# Altium PCB T-Type Converter.PcbDoc (part 2 of 4)
Units mil, origin at the board's own origin, x right, y up, seen from the top; angles counter-clockwise.
Board outline 14649.61 x 8960.63 mil, 2 copper layers (Top Layer, Bottom Layer), stack 64.8 mil thick; 214 components, 130 nets, 860 pads, 57 vias.
Unrouted connection lines stored in the file: 20.
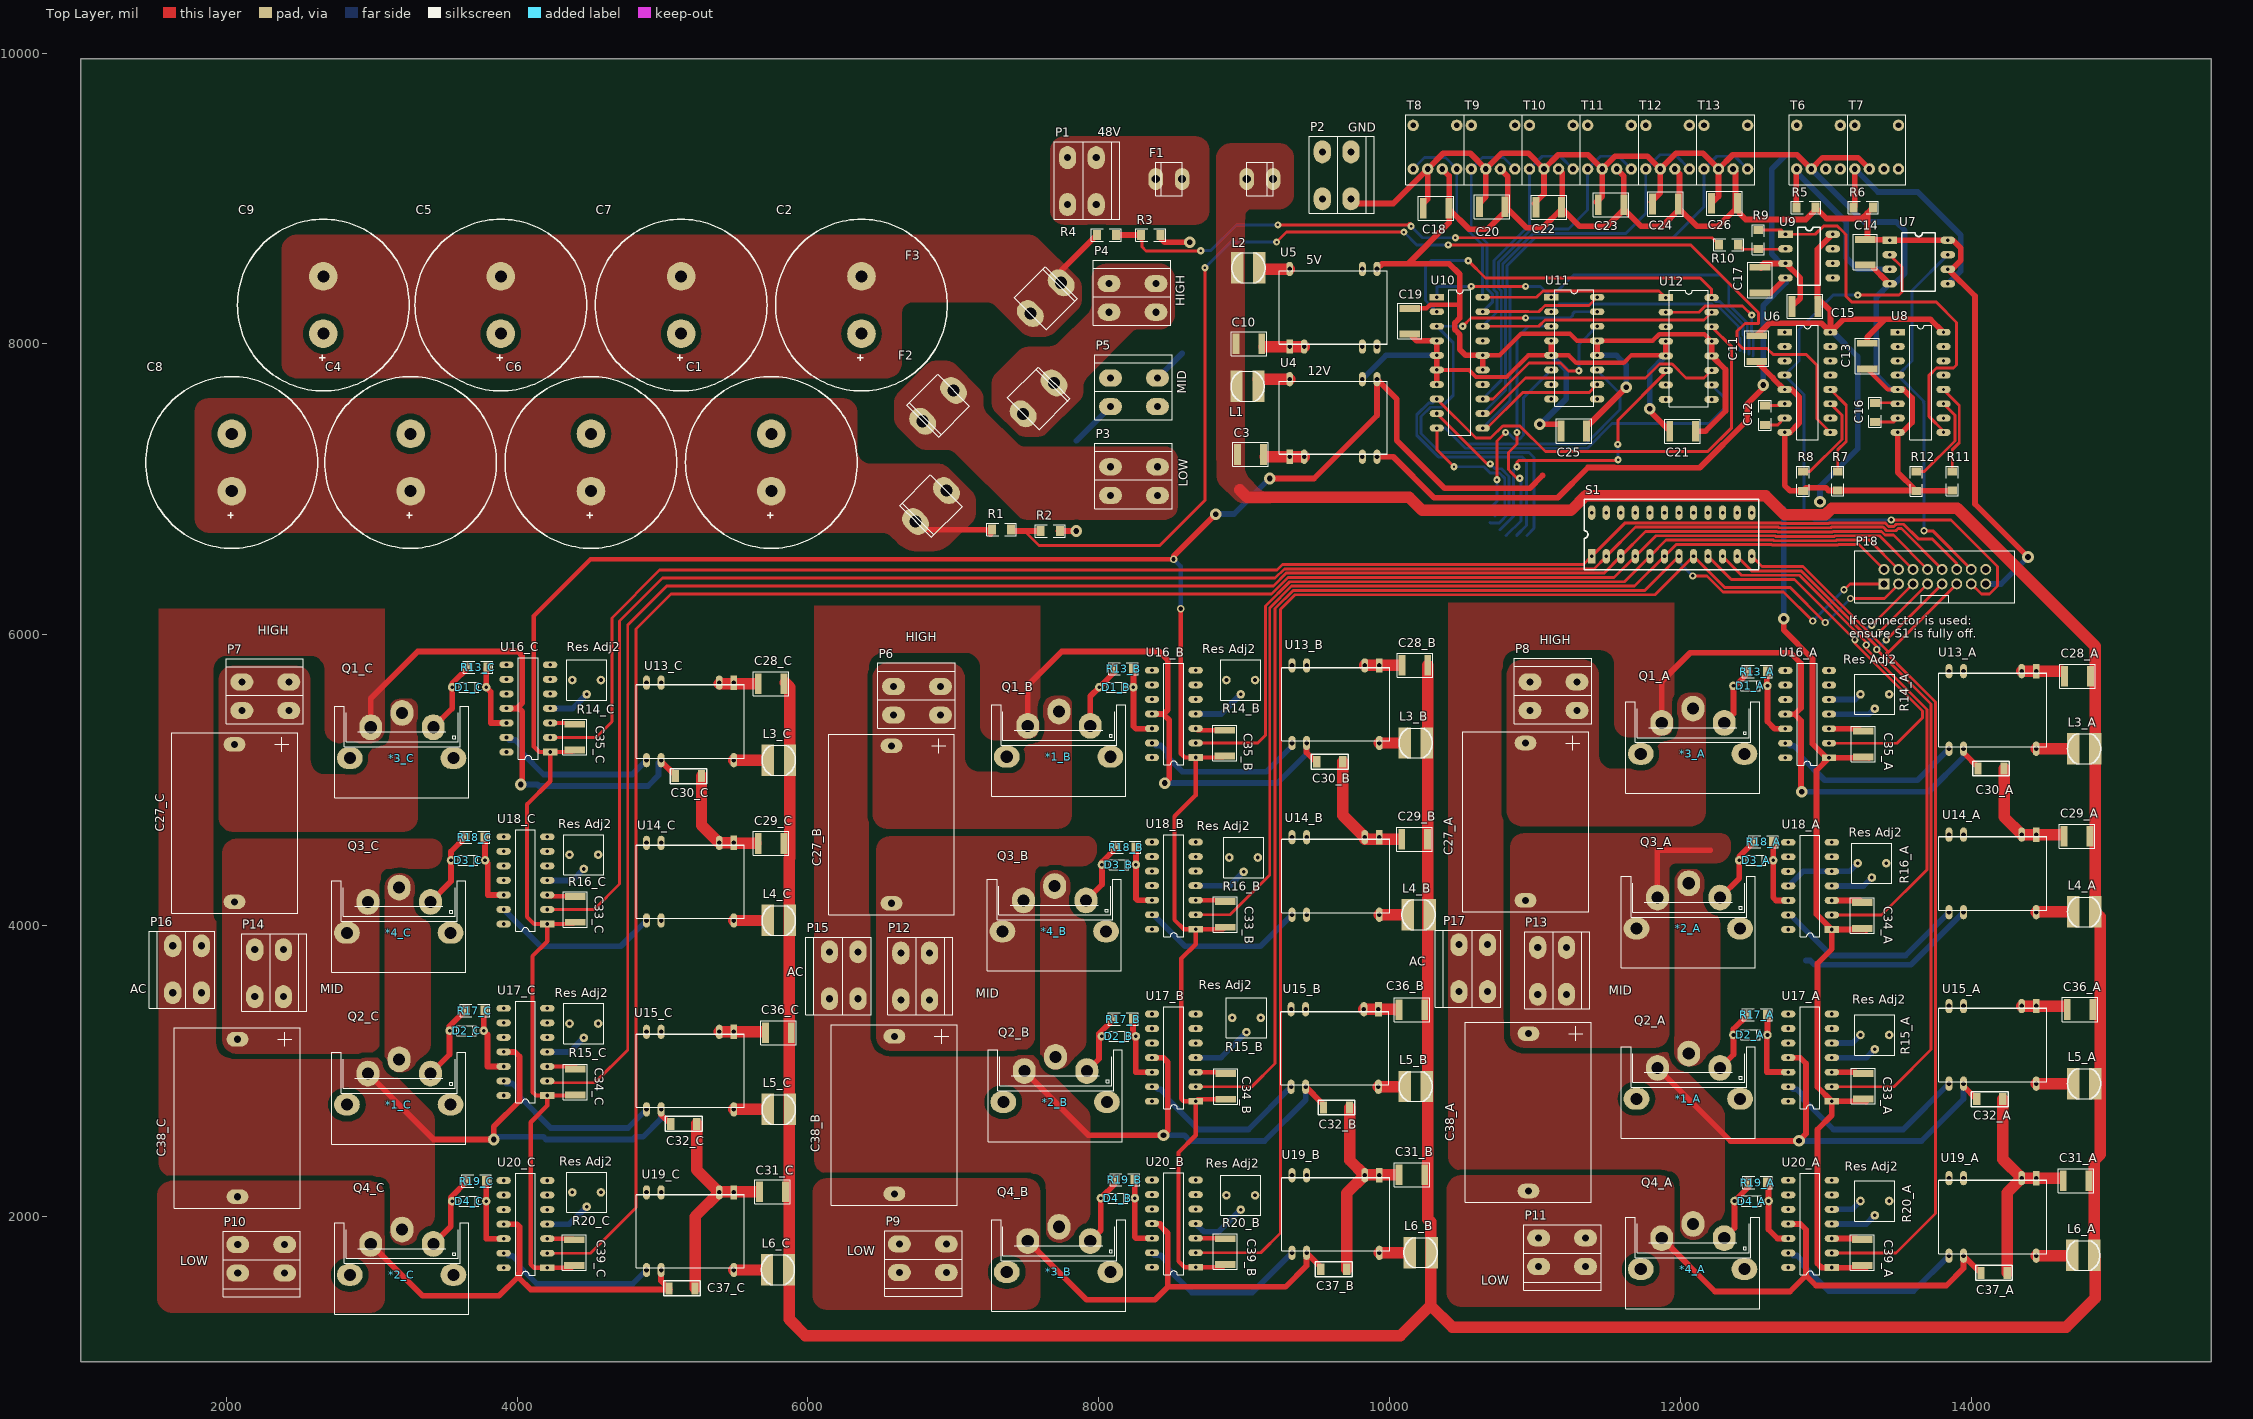
[diagram p0: Top Layer view]

## Part data (continued)
U9: "Dual Op-Amp", Case/Package=SC, Dual Supply Voltage=9V, Input Bias Current=27nA, Input Offset Voltage (Vos)=1mV, Manufacturer=STMicroelectronics, Manufacturer Part Number=LMV321LICT, Max Dual Supply Voltage=20V, Max Operating Temperature=125°C, Max Supply Current=5.6mA, Max Supply Voltage=5.5V, Min Dual Supply Voltage=4V, Min Operating Temperature=-40°C, Min Supply Voltage=2.7V, Nominal Supply Current=220uA, Operating Supply Current=130uA, Output Current=46mA, Output Current per Channel=70mA, Package Quantity=1, Power Supply Rejection Ratio (PSRR)=86dB, Supplier Part Number 1=497-13050-6-ND, Voltage Gain=100dB, Bandwidth=5MHz, Common Mode Rejection Ratio=72dB, ComponentLink1Description=https://datasheet.ciiva.com/6629/dm00052423-6629957.pdf, ComponentLink1URL=https://datasheet.ciiva.com/6629/dm00052423-6629957.pdf, ComponentLink2Description=https://datasheet.ciiva.com/6629/dm00052423-6629958.pdf, ComponentLink2URL=https://datasheet.ciiva.com/6629/dm00052423-6629958.pdf, ComponentLink3Description=https://datasheet.ciiva.com/13063/dm00052423-100852-13063497.pdf, ComponentLink3URL=https://datasheet.ciiva.com/13063/dm00052423-100852-13063497.pdf, ComponentLink4Description=https://datasheet.ciiva.com/16394/dm00052423-16394346.pdf, ComponentLink4URL=https://datasheet.ciiva.com/16394/dm00052423-16394346.pdf, ComponentLink5Description=https://datasheet.ciiva.com/2966/dm00052423-2966011.pdf, ComponentLink5URL=https://datasheet.ciiva.com/2966/dm00052423-2966011.pdf, ComponentLink6Description=https://datasheet.ciiva.com/41459/001184777-da-01-en-ic-op-amp-sgl-r-r-lmv321lict-sc-70-5-stm-41459586.pdf, ComponentLink6URL=https://datasheet.ciiva.com/41459/001184777-da-01-en-ic-op-amp-sgl-r-r-lmv321lict-sc-70-5-stm-41459586.pdf, ComponentLink7Description=https://datasheet.ciiva.com/19474/1728554-19474778.pdf, ComponentLink7URL=https://datasheet.ciiva.com/19474/1728554-19474778.pdf, ComponentLink8Description=https://datasheet.ciiva.com/1794/3824-1794779.pdf, ComponentLink8URL=https://datasheet.ciiva.com/1794/3824-1794779.pdf, ComponentLink9Description=https://datasheet.ciiva.com/5704/1712178-5704285.pdf, ComponentLink9URL=https://datasheet.ciiva.com/5704/1712178-5704285.pdf, ComponentLink10Description=https://datasheet.ciiva.com/26344/679699-da-01-en-ic-lt1057cn8-pbf-pdip-8-ltc-26344373.pdf, ComponentLink10URL=https://datasheet.ciiva.com/26344/679699-da-01-en-ic-lt1057cn8-pbf-pdip-8-ltc-26344373.pdf, Contact Plating=Tin, Gain Bandwidth Product=1.3MHz, Height=3.3mm, Lead Free="Lead Free", Length=10.16mm, Mount="Surface Mount", Nominal Gain Bandwidth Product=5MHz, Number of Amplifiers=2, Number of Channels=1, Number of Circuits=1, Number of Elements=1, Number of Pins=5, Packaging="Tape and Reel", Pricing 1="1=0.45, 10=0.363, 100=0.2472, 500=0.1854, 1000=0.1391 (USD)", Pricing 2="1=4.92, 25=3.27, 100=2.55 (USD)", Radiation Hardening=No, REACH SVHC="No SVHC", Slew Rate=0.7V/µs, Stock 1=42978, Stock 2=1166, Supplier 1=Digi-Key, Supplier 2=Digi-Key, Supplier Part Number 2=LT1057CN8#PBF-ND, Unity Gain Bandwidth Product=1.3MHz, Width=6.48mm
U10: "Hex Inverter", Case/Package=PDIP, High Level Output Current=-24mA, Low Level Output Current=24mA, Manufacturer="Texas Instruments", Manufacturer Part Number=74AC11004N, Max Operating Temperature=85°C, Max Supply Voltage=5.5V, Min Operating Temperature=-40°C, Min Supply Voltage=3V, Package Quantity=20, Quiescent Current=4uA, Supplier Part Number 1=296-4153-5-ND, Supply Voltage=5V, ComponentLink1Description=https://datasheet.ciiva.com/14289/74ac11004-14289990.pdf, ComponentLink1URL=https://datasheet.ciiva.com/14289/74ac11004-14289990.pdf, ComponentLink2Description=https://datasheet.ciiva.com/1869/74ac11004-1869911.pdf, ComponentLink2URL=https://datasheet.ciiva.com/1869/74ac11004-1869911.pdf, ComponentLink3Description=https://datasheet.ciiva.com/1157/1763878-1157128.pdf, ComponentLink3URL=https://datasheet.ciiva.com/1157/1763878-1157128.pdf, ComponentLink4Description=https://datasheet.ciiva.com/15089/getdatasheetpartid-371764-15089641.pdf, ComponentLink4URL=https://datasheet.ciiva.com/15089/getdatasheetpartid-371764-15089641.pdf, ComponentLink5Description=https://datasheet.ciiva.com/1153/1817335-1153741.pdf, ComponentLink5URL=https://datasheet.ciiva.com/1153/1817335-1153741.pdf, ComponentLink6Description=https://datasheet.ciiva.com/41426/001015348-da-01-en-ic-hex-inverter-7-74ac11004n-pdip-20-tid-41426322.pdf, ComponentLink6URL=https://datasheet.ciiva.com/41426/001015348-da-01-en-ic-hex-inverter-7-74ac11004n-pdip-20-tid-41426322.pdf, Contact Plating=Gold, Height=4.57mm, Lead Free="Lead Free", Length=26.92mm, Logic Function=Buffer,Inverter, Mount="Through Hole", Number of Bits=6, Number of Circuits=6, Number of Elements=6, Number of Gates=6, Number of Inputs=1, Number of Pins=20, Output Current=24mA, Packaging=Rail/Tube, Pricing 1="1=2.36, 10=2.12, 100=1.704, 500=1.4, 1000=1.16 (USD)", Propagation Delay=10ns, Radiation Hardening=No, REACH SVHC="No SVHC", Schmitt Trigger Input=No, Stock 1=747, Supplier 1=Digikey, Turn-On Delay Time=10ns, Weight=0.042297oz, Width=6.6mm
U11 U12: "AND GATE", Case/Package=DIP, High Level Output Current=-24mA, Low Level Output Current=24mA, Manufacturer="Texas Instruments", Manufacturer Part Number=74AC11008N, Max Operating Temperature=85°C, Max Supply Voltage=5.5V, Min Operating Temperature=-40°C, Min Supply Voltage=3V, Package Quantity=25, Quiescent Current=4uA, Supplier Part Number 1=296-4154-5-ND, Supply Voltage=5V, ComponentLink1Description=https://datasheet.ciiva.com/1869/74ac11008-1869907.pdf, ComponentLink1URL=https://datasheet.ciiva.com/1869/74ac11008-1869907.pdf, ComponentLink2Description=https://datasheet.ciiva.com/15215/getdatasheetpartid-541532-15215429.pdf, ComponentLink2URL=https://datasheet.ciiva.com/15215/getdatasheetpartid-541532-15215429.pdf, Contact Plating=Gold, Height=4.57mm, Lead Free="Lead Free", Length=19.69mm, Logic Function=AND, Mount="Through Hole", Number of Bits=4, Number of Circuits=4, Number of Elements=4, Number of Gates=4, Number of Input Lines=2, Number of Inputs=2, Number of Output Lines=1, Number of Outputs=1, Number of Pins=16, Output Current=24mA, Packaging=Rail/Tube, Pricing 1="1=2.36, 10=2.12, 100=1.704, 500=1.4, 1000=1.16 (USD)", Propagation Delay=6.9ns, Radiation Hardening=No, REACH SVHC="No SVHC", Schmitt Trigger Input=No, Stock 1=236, Supplier 1=Digikey, Turn-On Delay Time=6.9ns, Weight=0.03357oz, Width=6.6mm
U13_A U13_B U13_C U14_A U14_B U14_C U15_A U15_B U15_C U19_A U19_B U19_C: "48V-12V Converter", Current - Output 1=250mA, Isolation Voltage=1.5kV, Manufacturer="Traco Power", Manufacturer Part Number=TDR3-4812WI, Max Input Voltage=75V, Max Operating Temperature=85°C, Max Output Power=3W, Min Input Voltage=36V, Min Input Voltage (DC)=18V, Min Operating Temperature=-40°C, Nominal Input Voltage=48V, Nominal Output Voltage=12V, Supplier Part Number 1=70W2197, ComponentLink1Description=https://datasheet.ciiva.com/7625/1763545-7625255.pdf, ComponentLink1URL=https://datasheet.ciiva.com/7625/1763545-7625255.pdf, ComponentLink2Description=https://datasheet.ciiva.com/3356/tdr3wi-eng-tds-3356635.pdf, ComponentLink2URL=https://datasheet.ciiva.com/3356/tdr3wi-eng-tds-3356635.pdf, ComponentLink3Description=https://datasheet.ciiva.com/26336/157237-da-01-de-dc-dc-wandler-tdr-3-4812wi-26336242.pdf, ComponentLink3URL=https://datasheet.ciiva.com/26336/157237-da-01-de-dc-dc-wandler-tdr-3-4812wi-26336242.pdf, Depth=18.9mm, Efficiency=81%, Height=8.7mm, Length=18.9mm, Max Input Voltage (DC)=75V, Max Output Current=250mA, Number of Outputs=1, Output Current=250mA, Output Voltage=12V, REACH SVHC="No SVHC", Stock 1=0, Supplier 1=Newark, Voltage - Output 1=12V, Width=12.8mm
U16_A U16_B U16_C U17_A U17_B U17_C U18_A U18_B U18_C U20_A U20_B U20_C: "HALF-BRIDGE DRIVER"
L1 L2 L3_A L3_B L3_C L4_A L4_B L4_C L5_A L5_B L5_C L6_A L6_B L6_C: Code_IEC=1005, Code_JEITA=0402, LatestRevisionDate=29-May-2009, LatestRevisionNote="IPC-7351 Footprint Added.", PackageDescription="Chip Inductor", PackageReference=0402-A, Published=8-Jun-2000, Publisher="Altium Limited"
P6 P7 P8 P9 P10 P11 P12 P13 P14: PN=B2A-PCB-HEX, URL=https://lugsdirect.com/IHI_HIGH_CURRENT_PCB-TERMINALS-_SELECTION_CHART2.htm#85A

## Via types
v1: diameter 50, hole 17, Top Layer to Bottom Layer, 25 vias
v2: diameter 80, hole 39, Top Layer to Bottom Layer, 17 vias
v3: diameter 50, hole 25, Top Layer to Bottom Layer, 13 vias
v4: diameter 50, hole 28, Top Layer to Bottom Layer, 2 vias

## Nets (pads, with @x,y where several pads share a name; then routed paths per layer and width w, separated by ;. In a path a pad name is that pad's centre, name@x,y a point inside that pad or via, vN(x,y) a via of type N, cw(c..) or ccw(c..) an arc to the next point about the centre after c; other vN are vias at no path point)
5V: C14.2 C18.2 C19.2 C20.2 C21.2 C22.2 C23.2 C24.2 C25.2 C26.2 P18.8 R5.2 R6.2 T8.3 T9.3 T10.3 T11.3 T12.3 T13.3 U5.8 U7.1 U7.6 U7.8 U10.15 U10.16 U11.12 U11.13 U12.12 U12.13 | length 14531.2
  Top Layer w29.53: C19.2@10138.78,8245.08 10254.21,8245.08 10279.17,8270.04 10479.69,8270.04 10482.28,8272.64 ; U10.16@10639.76,7921.65 10641.34,7923.23 10757.87,7923.23 10904.68,8070.04 11240.98,8070.04 11289.37,8021.65 U11.13@11427.17,8021.65 11808.74,8021.65 11853.97,8066.89 12166.18,8066.89 U12.13@12214.57,8018.5
  Top Layer w39.37: U5.8@9912.99,8515.75 9949.21,8551.97 10127.95,8551.97 ; T8.3@10361.81,9203.54 10409.45,9155.9 C18.2@10409.45,8928.15 ; U10.15@10639.76,7821.65 U10.16@10639.76,7921.65 10523.23,7921.65 10482.28,7962.6 10482.28,8065.58 10448.86,8099 10448.86,8144.3 10482.28,8177.73 10482.28,8272.64 10482.28,8479.13 10409.45,8551.97 10127.95,8551.97 ; T9.3@10761.81,9203.54 10812.99,9152.36 C20.2@10812.99,8928.15 ; T10.3@11161.81,9203.54 11187.01,9178.35 C22.2@11187.01,8928.15 ; C25.2@11351.38,7447.83 11373.03,7447.83 v2(11626.97,7701.77) ; U11.12@11427.17,7921.65 U11.13@11427.17,8021.65 ; T11.3@11561.81,9203.54 11610.24,9155.12 C23.2@11610.24,8928.15 ; T12.3@11961.81,9203.54 11994.09,9171.26 C24.2@11994.09,8928.15 ; C21.2@12103.35,7400.59 12172.24,7400.59 12310.04,7538.39 12310.04,7824.01 12215.55,7918.5 U12.12@12214.57,7918.5 U12.13@12214.57,8018.5 ; T13.3@12361.81,9203.54 12377.95,9187.4 C26.2@12377.95,8928.15 ; R6.2@13322.83,8937.99 13286.42,8901.57 ; U7.6@13838.58,8513.78 13840.92,8513.78 14025,8329.7 14025,6900 v2(14390,6535) ; U7.6@13868.11,8513.78 13928.15,8573.82 13928.15,8660.43 13874.8,8713.78 U7.8@13838.58,8713.78 U7.1@13438.58,8713.78 13435.83,8716.54 13286.42,8716.54 13286.42,8901.57 ; 10127.95,8551.97 10409.45,8833.46 C18.2@10409.45,8928.15 ; C18.2@10409.45,8928.15 10548.23,8789.37 10674.21,8789.37 C20.2@10812.99,8928.15 ; C20.2@10812.99,8928.15 10941.93,8799.21 11053.15,8799.21 11182.09,8928.15 C22.2@11187.01,8928.15 ; C22.2@11187.01,8928.15 11306.1,8809.06 11496.06,8809.06 11610.24,8923.23 C23.2@11610.24,8928.15 ; C23.2@11610.24,8928.15 11729.33,8809.06 11875,8809.06 C24.2@11994.09,8928.15 ; C24.2@11994.09,8928.15 12113.19,8809.06 12258.86,8809.06 C26.2@12377.95,8928.15 ; C26.2@12377.95,8928.15 12449.8,8856.3 12862.2,8856.3 12929.13,8923.23 R5.2@12929.13,8937.99 13004.92,8862.2 13247.05,8862.2 13286.42,8901.57
  Bottom Layer w39.37: U11.12@11427.17,7921.65 11560.63,7921.65 11626.97,7855.31 v2(11626.97,7701.77) ; P18.8@14100,6350 14205,6350 v2(14390,6535)